# Altium PCB TLE5012_S2G1.PcbDoc
Units mm, origin at the board's own origin, x right, y up, seen from the top; angles counter-clockwise.
Board outline 14 x 38.5 mm, 2 copper layers (L1_Top, L14_Bot), stack 1.62 mm thick; 16 components, 14 nets, 84 pads, 47 vias.
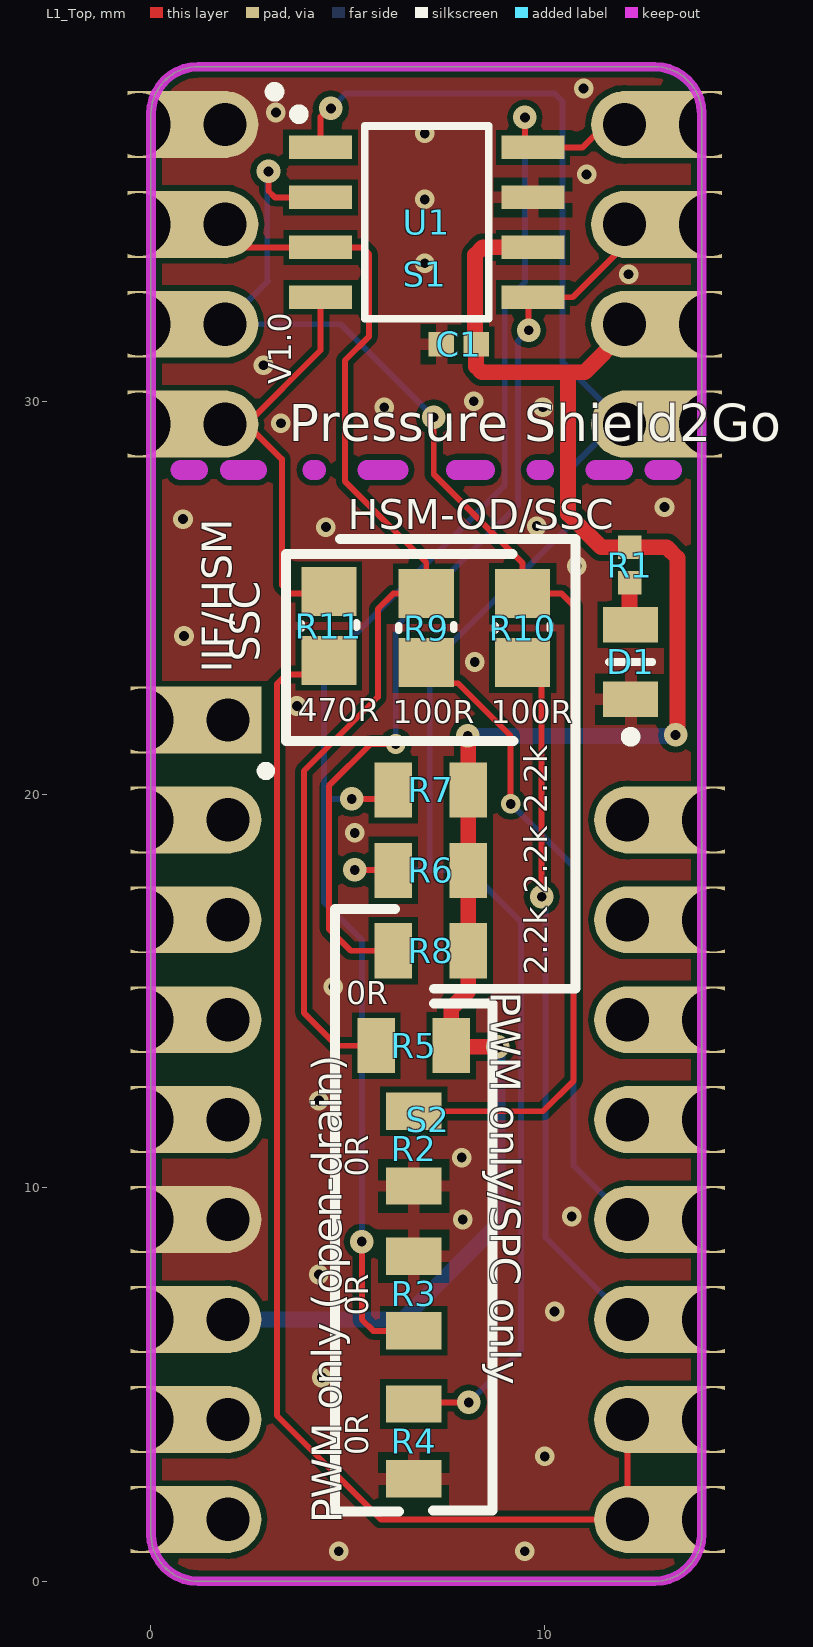
[diagram p0: L1_Top view]
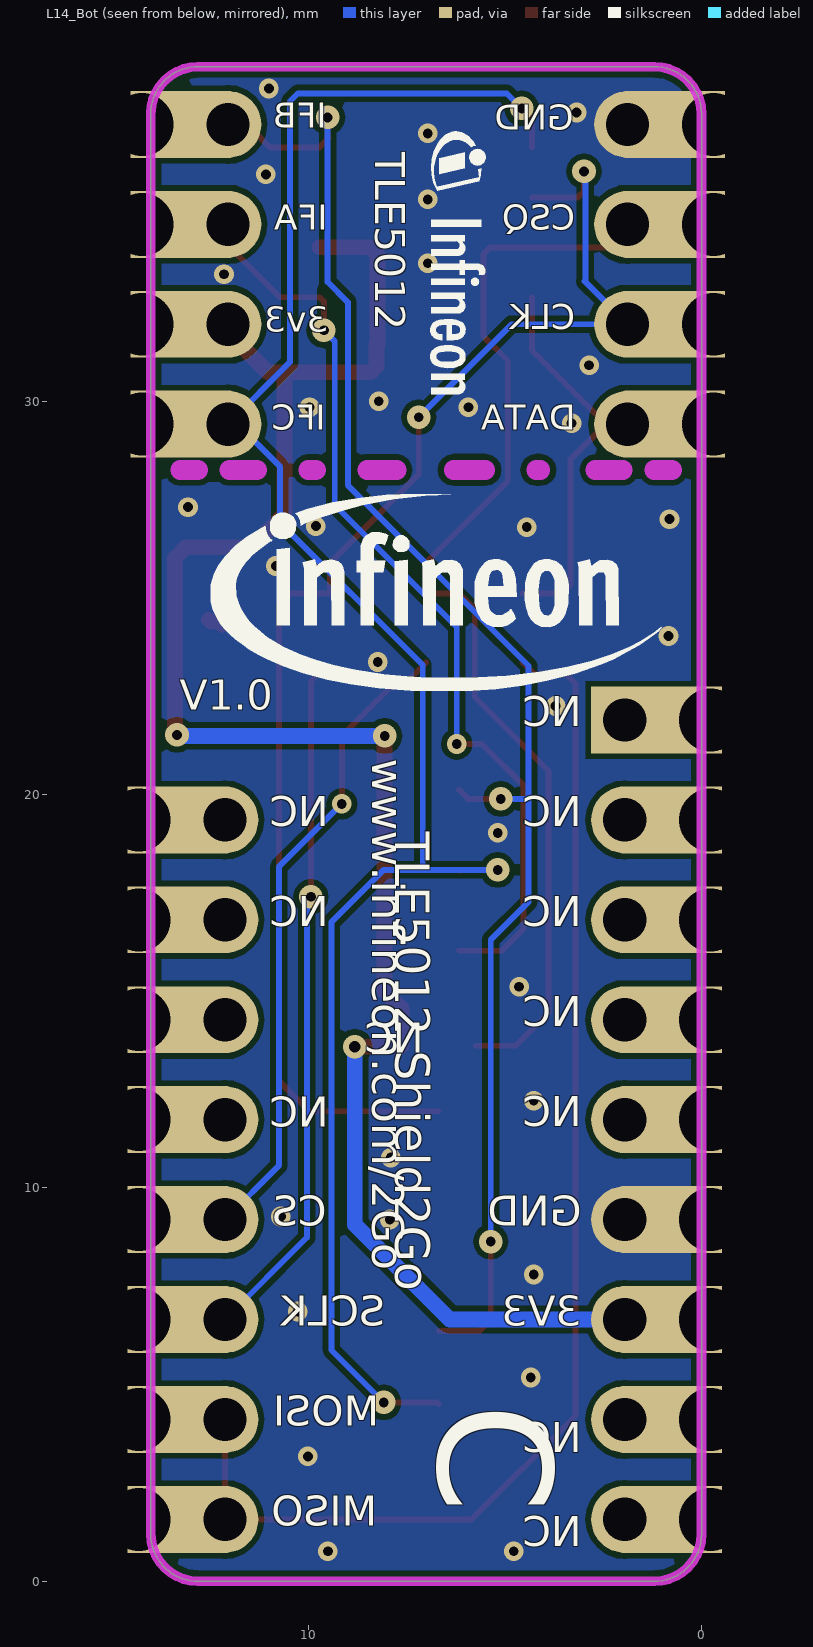
[diagram p1: L14_Bot view, seen from below]

## Layer stack, top to bottom
Top Solder: solder mask 0.02, Solder Resist, Dk 3.5
L1_Top: signal copper 0.035
Dielectric1: core 1.55, FR-4, Dk 4.2
L14_Bot: signal copper 0.035
Bottom Solder: solder mask 0.02, Solder Resist, Dk 3.5

## Board outline
0,1.2 0,37.3 cw(c1.2,37.3) 1.2,38.5 12.8,38.5 cw(c12.8,37.3) 14,37.3 14,1.2 cw(c12.8,1.2) 12.8,0 1.2,0 cw(c1.2,1.2)

## Design rules (kind name [scope] priority, off if disabled: settings)
Clearance ConnectorAndSidePads [(InNamedUnion('Connectors') OR InNamedUnion('Connector_Side_Pads')) vs OnLayer('Keep-Out Layer')] p1: gap=0 ignorepadtopadclearanceinfootprint=FALSE
Clearance Clearance_HighVoltage [InNetClass('HighVoltage') vs Not InNetClass('HighVoltage')] p2: gap=0.5 ignorepadtopadclearanceinfootprint=FALSE except(0: Arc-Hole Track-Hole SMDPad-Hole THPad-Hole Via-Hole Fill-Hole Poly-Hole Region-Hole Text-Hole)
Clearance Clearance_BGA [WithinRoom('BGA_Fanout_Area')] p3: gap=0.1 ignorepadtopadclearanceinfootprint=FALSE except(0: Arc-Hole Track-Hole SMDPad-Hole THPad-Hole Via-Hole Fill-Hole Poly-Hole Region-Hole Text-Hole) // Clearance for BGA Fanout Area
Clearance Clearance_NDK [((HoleType ='Round') and (PadisPlated = 'False')) and not (Holesize ='0')  or ((HoleType ='Slot') and (PadisPlated = 'False')) and not (Holesize ='0')] p4: gap=0.5 ignorepadtopadclearanceinfootprint=FALSE except(0: Arc-Hole Track-Hole SMDPad-Hole THPad-Hole Via-Hole Fill-Hole Poly-Hole Region-Hole Text-Hole) // Clearance Non Plated Holes
Clearance Clearance_Fiducials [InComponentClass('Fiducials')] p5: gap=1 ignorepadtopadclearanceinfootprint=FALSE except(0: Arc-Hole Track-Hole SMDPad-Hole THPad-Hole Via-Hole Fill-Hole Poly-Hole Region-Hole Text-Hole)
Clearance Clearance_Edge_Fiducials [InComponentClass('Fiducials')] p6 off: gap=6 ignorepadtopadclearanceinfootprint=FALSE except(0: Arc-Hole Track-Hole SMDPad-Hole THPad-Hole Via-Hole Fill-Hole Poly-Hole Region-Hole Text-Hole) // Protel DXP Scope 2 Expression Was: IsBoardOutline
Clearance Clearance_All [All] p7: gap=0.15 ignorepadtopadclearanceinfootprint=FALSE except(0: Arc-Hole Track-Hole SMDPad-Hole THPad-Hole Via-Hole Fill-Hole Poly-Hole Region-Hole Text-Hole) // minimum Clearance on PCB
ComponentClearance SidePadsClearance [InNamedUnion('Connector_Side_Pads')] p1: gap=0 collisioncheckmode=3 verticalgap=0 showdistances=FALSE
ComponentClearance R11-14/R21-24 [InNamedUnion('0OhmResistorsR11-14/R21-24') vs InNamedUnion('0OhmResistorsR11-14/R21-24')] p2: gap=0 collisioncheckmode=3 verticalgap=0 showdistances=FALSE
ComponentClearance ConnectorClearance [InNamedUnion('Connectors') vs InNamedUnion('Frame')] p3: gap=0 collisioncheckmode=3 verticalgap=0 showdistances=FALSE
ComponentClearance ComponentClearance_1 [All] p4: gap=0.254 collisioncheckmode=3 verticalgap=0.254 showdistances=FALSE
DiffPairsRouting DiffPairsRouting_Z0_DIFF_100R [InNetClass('Z0_DIFF_100R')] p1: maxlimit=0.2 minlimit=0.2 mostfreqgap=0.2 toplayer_minwidth=0.381 toplayer_maxwidth=0.381 toplayer_prefwidth=0.381 bottomlayer_minwidth=0.381 bottomlayer_maxwidth=0.381 bottomlayer_prefwidth=0.381 maxuncoupledlength=25
DiffPairsRouting DiffPairsRouting_All [All] p2: maxlimit=0.5 minlimit=0.12 mostfreqgap=0.15 toplayer_minwidth=0.381 toplayer_maxwidth=0.381 toplayer_prefwidth=0.381 bottomlayer_minwidth=0.381 bottomlayer_maxwidth=0.381 bottomlayer_prefwidth=0.381 maxuncoupledlength=25
FabricationTestPointUsage TestPointUsage [All] p1: valid=0 allowmultiple=FALSE
FabricationTestpoint Testpoint [All] p1: side=3 testpointundercomponent=TRUE minsize=1 maxsize=2.5 preferedsize=1.5 minholesize=0 maxholesize=1 preferedholesize=0.8 testpointgrid=0.025 allowsidetop=TRUE allowsidebottom=TRUE usegrid=TRUE gridtolerance=0
FanoutControl Fanout_LCC [All] p1 off: bgadir=Out bgaviamode=Centered fanoutstyle=Auto fanoutdirection=Alternating viagrid=0.025 // Protel DXP Scope 1 Expression Was: IsLCC   Fanout_LCC (Default Rule)
FanoutControl Fanout_BGA [All] p2 off: bgadir=Out bgaviamode=Centered fanoutstyle=Auto fanoutdirection=Alternating viagrid=0.025 // Protel DXP Scope 1 Expression Was: IsBGA   Fanout_BGA (Default Rule)
FanoutControl Fanout_SOIC [All] p3 off: bgadir=Out bgaviamode=Centered fanoutstyle=Auto fanoutdirection=Alternating viagrid=0.025 // Protel DXP Scope 1 Expression Was: IsSOIC   Fanout_SOIC (Default Rule)
FanoutControl Fanout_Default [All] p4: bgadir=Out bgaviamode=Centered fanoutstyle=Auto fanoutdirection=Alternating viagrid=0.025 // Fanout_Default (Default Rule)
FanoutControl Fanout_Small [All] p5 off: bgadir=Out bgaviamode=Centered fanoutstyle=Auto fanoutdirection=Alternating viagrid=0.025 // Protel DXP Scope 1 Expression Was: (CompPinCount < 5)   Fanout_Small (Default Rule)
Height Height_Top_In_Area [WithinRoom('Height_Top_Area')] p1: minheight=0 maxheight=8.4 prefheight=5.7 // Dedicated Height Constraint in Area
Height Height_Bot_No_Constraint [InComponentClass('Height_Bottom_exclude')] p2: minheight=0 maxheight=999 prefheight=12.7 // no max. Height constraint on Bottom Side
Height Height_Top_No_Constraint [InComponentClass('Height_Top_exclude')] p3: minheight=0 maxheight=999 prefheight=12.7 // no max. Height constraint on Top Side
Height Height_Bot [OnBottom] p4: minheight=0 maxheight=3 prefheight=2.5 // max. Component Height on PCB Bottom Side
Height Height_All [All] p5: minheight=0 maxheight=50 prefheight=12.7 // Default Component Height
HoleSize HoleSize_All [All] p1: absolutevalues=TRUE maxlimit=3 minlimit=0.2 maxpercent=80.000 minpercent=20.000
HoleToHoleClearance [All] p1: gap=0.25 allowstackedmicrovias=TRUE
Length Length_HighSpeed [InNetClass('HighSpeed')] p1: maxlimit=250 minlimit=0
Length Length_Default [InNetClass('TraceLength')] p2: maxlimit=500 minlimit=0 // min./max. Trace Length will be applied
MatchedLengths MatchedLengths_HighSpeed [InNetClass('HighSpeed')] p1: tolerance=25.4 checknetsindiffpair=FALSE checkdiffpairvsdiffpair=TRUE checkxsignals=TRUE checkothers=TRUE
MatchedLengths MatchedLengths_Default [InNetClass('MatchedLength')] p2: tolerance=100.5 checknetsindiffpair=TRUE checkdiffpairvsdiffpair=FALSE checkxsignals=FALSE checkothers=FALSE // Default Length Matching
MaxMinImpedance MaxMinImpedance_Z0_50R [InNetClass('Z0_50R')] p1: minimum=45,00 maximum=55,00 // Impedance Tolerance for 50 Ohms Traces
MaxMinImpedance MaxMinImpedance_All [All] p2: minimum=30,00 maximum=80,00 // Default Impedance Tolerance
MaximumViaCount MaximumViaCount_CLK [InNetClass('Clock')] p1: limit=10
MaximumViaCount MaximumViaCount_HighSpeed [InNetClass('HighSpeed')] p2: limit=10 // Max. Number of Vias in Net
MinimumAnnularRing MinimumAnnularRing_All [All] p1: minimumring=0.1
MinimumSolderMaskSliver [All] p1: minsoldermaskwidth=0.2
NetAntennae NetAntennae_High_Speed [InNetClass('HighSpeed')] p1: netantennaetolerance=3
NetAntennae NetAntennae_All [All] p2: netantennaetolerance=10
ParallelSegment ParallelSegment_Broad_Default [InNetClass('XTalk_Broadside_Coupled') vs InNetClass('HighSpeed') Or InNetClass('XTalk_Broadside_Coupled') Or InNetClass('XTalk_Edge_Coupled')] p1: limit=15 gap=0.2 // Default Rule for Broadside-Coupled Traces
ParallelSegment ParallelSegment_Edge_Default [InNetClass('XTalk_Edge_Coupled') vs InNetClass('HighSpeed') Or InNetClass('XTalk_Broadside_Coupled') Or InNetClass('XTalk_Edge_Coupled')] p2: limit=15 gap=0.12 // Default Rule for Edge-Coupled Traces
ParallelSegment ParallelSegment_Default [InNetClass('HighSpeed') vs InNetClass('HighSpeed')] p3: limit=25 gap=0.12 // Max. Coupled Length for all High-Speed Signals
PlaneClearance PlaneClearance_HighVoltage [InNetClass('HighVoltage')] p1: clearance=0.5
PlaneClearance [All] p2: clearance=0.2
PlaneConnect PlaneConnect_All [InNet('GND')] p1: planeconnectstyle=Direct reliefexpansion=0.2 reliefentries=4 reliefconductorwidth=0.25 reliefairgap=0.2
PolygonConnect PolygonConnect_Via [IsNamedPolygon('GND-B') Or IsNamedPolygon('GND-T') vs IsVia] p1: thpad.connectstyle=Direct thpad.reliefconductorwidth=0.254 thpad.reliefentries=4 thpad.polygonreliefangle="90 Angle" thpad.airgapwidth=0.254 smdpad.connectstyle=Relief smdpad.reliefconductorwidth=0.3 smdpad.reliefentries=4 smdpad.polygonreliefangle="90 Angle" smdpad.airgapwidth=0.2 via.connectstyle=Direct via.reliefconductorwidth=0.254 via.reliefentries=4 via.polygonreliefangle="90 Angle" via.airgapwidth=0.254
PolygonConnect PolygonConnectGroundVias [InNamedUnion('GroundVias')] p2: connectstyle=Direct reliefconductorwidth=0.254 reliefentries=4 polygonreliefangle="90 Angle" airgapwidth=0.254
PolygonConnect PolygonConnect_All [All] p3: thpad.connectstyle=Direct thpad.reliefconductorwidth=0.3 thpad.reliefentries=4 thpad.polygonreliefangle="90 Angle" thpad.airgapwidth=0.2 smdpad.connectstyle=Relief smdpad.reliefconductorwidth=0.3 smdpad.reliefentries=4 smdpad.polygonreliefangle="90 Angle" smdpad.airgapwidth=0.2 via.connectstyle=Direct via.reliefconductorwidth=0.3 via.reliefentries=4 via.polygonreliefangle="90 Angle" via.airgapwidth=0.2 // Default Polygon Connection
PolygonConnect PolygonConnect_HighCurrent [(OnTopLayer Or OnBottomLayer) And InNetClass('HighCurrent')] p4: connectstyle=Relief reliefconductorwidth=0.25 reliefentries=4 polygonreliefangle="90 Angle" airgapwidth=0.25
PolygonConnect PolygonConnect_Outer [OnTopLayer Or OnBottomLayer] p5: connectstyle=Relief reliefconductorwidth=0.2 reliefentries=4 polygonreliefangle="90 Angle" airgapwidth=0.25 // Polygon Connection on outer Layers
RoutingCorners [All] p1: cornerstyle=45-Degree minsetback=2 maxsetback=2
RoutingTopology RoutingTopology_CLK [InNetClass('Clock')] p1: topology=Daisy_Balanced
RoutingTopology RoutingTopology_HighSpeed [InNetClass('HighSpeed')] p2: topology=Daisy_Simple
RoutingTopology RoutingTopology_All [All] p3: topology=Shortest
RoutingVias RoutingVias_All [All] p1: holewidth=0.35 width=0.5 viastyle="Through Hole" minholewidth=0.15 minwidth=0.3 maxholewidth=0.4 maxwidth=0.6 // Default Via size
RoutingVias RoutingVias_HighCurrent [InNetClass('HighCurrent')] p2 off: holewidth=0.3 width=0.9 viastyle="Through Hole" minholewidth=0.3 minwidth=0.9 maxholewidth=0.4 maxwidth=0.9 // Via Size for High-Current Nets
RoutingVias RoutingVias_BGA_Fanout [WithinRoom('BGA_Fanout_Area')] p3 off: holewidth=0.2 width=0.48 viastyle="Through Hole" minholewidth=0.2 minwidth=0.48 maxholewidth=0.3 maxwidth=0.8 // Via Size for BGA Fanout Area
RoutingVias RoutingVias_PWR [(InNet('GND') OR InNet('PWR_3V3'))] p4 off: holewidth=0.3 width=0.8 viastyle="Through Hole" minholewidth=0.25 minwidth=0.8 maxholewidth=0.3 maxwidth=0.9 // Via size for Power and GND nets
SilkToSilkClearance [All] p1: silktosilkclearance=0.15
SilkToSolderMaskClearance SilkscreenOverComponentPads [IsPad] p1: minsilkscreentomaskgap=0.2 clearancetoexposedcopper=TRUE
SolderMaskExpansion SolderMaskExpansion_1 [All] p1: expansion=0
StubLength StubLength_CLK [InNetClass('Clock')] p1: limit=25
StubLength StubLength_HighSpeed [InNetClass('HighSpeed')] p2: limit=30
SupplyNets SupplyNets_GND [InNet('GND')] p1: voltage=0,000
SupplyNets SupplyNets_12V [InNetClass('PWR_Supply_12V')] p2: voltage=12,00
SupplyNets SupplyNets_5V0 [InNetClass('PWR_Supply_5V0')] p3: voltage=5,000
SupplyNets SupplyNets_3V3 [InNetClass('PWR_Supply_3V3')] p4: voltage=3,000
SupplyNets SupplyNets_1V0 [InNetClass('PWR_Supply_1V0')] p5: voltage=1,000
Width Width_PWR [(InNet('GND') OR InNet('PWR_3V3'))] p1: maxlimit=5 minlimit=0.2 preferedwidth=0.4 // Width for Power and GND nets
Width Width_All [All] p2: maxlimit=2 minlimit=0.15 preferedwidth=0.15 // minimum Width on PCB
Width Width_HighCurrent [All] p3: maxlimit=5 minlimit=0.3 preferedwidth=0.3 // Width for High-Current Traces
Width Width_BGA_Fanout [WithinRoom('BGA_Fanout_Area')] p4: maxlimit=1 minlimit=0.1 preferedwidth=0.1 // Trace Width for BGA Fanout Area
Width Width_Z0_DIFF_100R [InNetClass('Z0_DIFF_100R')] p5: maxlimit=0.12 minlimit=0.12 preferedwidth=0.12 minimp=50.000000 maximp=50.000000 favimp=50.000000
Width Width_Z0_50R [InNetClass('Z0_50R')] p6: maxlimit=0.16 minlimit=0.16 preferedwidth=0.16 minimp=50.000000 maximp=50.000000 favimp=50.000000
10 further rules are at their usual default settings.

## Classes and differential pairs
component class U_TLE5012_S2G1: C1 D1 R1 R2 R3 R4 R5 R6 R7 R8 R9 R10 R11 S1 U1
component class U_Modular_S2G1_Pinout_Diagram_Connectors_V1: S2

## Components (designator, comment, footprint, x,y, rotation, side; value= is the part's Value field where it differs from the comment)
C1 "0.10u" CAPC1005X55N-0 7.823,31.445 r0 top
D1 "" LEDC2013X90N 12.192,23.368 r90 top value=SML-211UT
R1 "680R" RESC1005X03N 12.167,25.832 r90 top
R2 "0R" RESC2013X60N 6.68,10.998 r270 top
R3 "0R" RESC2013X60N 6.68,7.315 r90 top
R4 "0R" RESC2013X60N 6.68,3.556 r270 top
R5 "0R" RESC2013X60N 6.68,13.614 r0 top
R6 "2.2k" RESC2013X60N 7.112,18.072 r0 top value=0R
R7 "2.2k" RESC2013X60N 7.112,20.117 r0 top value=0R
R8 "2.2k" RESC2013X60N 7.112,16.027 r0 top value=0R
R9 "100R" RESC2012X05N 6.998,24.232 r90 top
R10 "100R" RESC2012X05N 9.449,24.232 r90 top
R11 "470R" RESC2012X05N 4.521,24.282 r90 top
S1 "Shield2Go-S2G-2A" PIN_8_2R_4_A 1.88,29.413 r0 top locked
S2 "" Modular_S2G1_A 1.956,1.575 r0 top locked
U1 "TLE5012B" SOIC127P600X175-8N-3 7.01,34.544 r0 top

## Footprints (in the part's own frame and the unit in brackets; to place one, negate y for a bottom-side part, rotate by r counter-clockwise, add the part's x,y. Pads: shape width x height; smd on the part's side, far side on the other; paste and mask are expansions set on the pad)
CAPC1005X55N-0 [mm] "Capacitor,non-polarized,Chip;1.00mm L X 0.50mm W X 0.55mm H"
  rect 0.65x0.62 smd paste+0 mask+0: 1(-0.44,0) 2(0.44,0)
  body extent -0.5,-0.25 0.5,0.25, height 0.55
LEDC2013X90N [mm] "LED,Chip;2.00mm L X 1.25mm W X 0.90mm H"
  rect 0.9x1.4 smd paste+0 mask+0: 1(-0.95,0) 2(0.95,0)
  silkscreen extent -2.02,-0.55 0,0.55, body extent -1,-0.63 1,0.63, height 0.9
Modular_S2G1_A [mm] "Modular M1 active footprint for modular boards."
  rect 2.565x1.7 hole 1.6 copper offset 0.982,0 paste+0 mask+0: 1(-2.18,20.32) 2(-2.18,17.78) 3(-2.18,15.24) 4(-2.18,12.7) 5(-2.18,10.16) 6(-2.18,7.62) 7(-2.18,5.08) 8(-2.18,2.54) 9(-2.18,0)
  rect 1.7x1.7 hole 1.1 paste+0 mask+0: 1(0,20.32)
  round 1.7 hole 1.1 paste+0 mask+0: 2(0,17.78) 3(0,15.24) 4(0,12.7) 5(0,10.16) 6(0,7.62) 7(0,5.08) 8(0,2.54) 9(0,0) 10(10.16,17.78) 11(10.16,15.24) 12(10.16,12.7) 13(10.16,10.16) 14(10.16,7.62) 15(10.16,5.08) 16(10.16,2.54) 17(10.16,0)
  rect 2.565x1.7 hole 1.6 copper offset -0.982,0 paste+0 mask+0: 10(12.34,17.78) 11(12.34,15.24) 12(12.34,12.7) 13(12.34,10.16) 14(12.34,7.62) 15(12.34,5.08) 16(12.34,2.54) 17(12.34,0)
  silkscreen extent 0.86,18.92 1.07,19.13
PIN_8_2R_4_A [mm] "Connector for 8 pins, 2 rows of each 4 with 400mil/100mil spacing."
  rect 2.565x1.7 hole 1.6 copper offset 0.982,0 paste+0 mask+0: 1(-2.18,7.62) 2(-2.18,5.08) 3(-2.18,2.54) 4(-2.18,0)
  round 1.7 hole 1.1 paste+0 mask+0: 1(0,7.62) 2(0,5.08) 3(0,2.54) 4(0,0) 5(10.16,7.62) 6(10.16,5.08) 7(10.16,2.54) 8(10.16,0)
  rect 2.565x1.7 hole 1.6 copper offset -0.982,0 paste+0 mask+0: 5(12.34,7.62) 6(12.34,5.08) 7(12.34,2.54) 8(12.34,0)
  silkscreen extent 1.14,8.32 1.39,8.57
RESC1005X03N [mm] "Resistor,Chip;1.00mm L X 0.50mm W X 0.40mm H"
  rect 0.6x0.6 smd paste+0 mask+0: 1(-0.45,0) 2(0.45,0)
  body extent -0.5,-0.25 0.5,0.25, height 0.4
RESC2012X05N [mm] "Chip Resistor, 2-Leads, Body 2,0x1,3mm, IPC Medium Density"
  rect 1.25x1.4 smd mask+0: 1(-0.875,0) 2(0.875,0)
  silkscreen extent -0.05,-0.7 0.08,0.7, body extent -1.07,-0.7 1.08,0.7, height 0.5
RESC2013X60N [mm] "Resistor,Chip;2.00mm L X 1.25mm W X 0.60mm H"
  rect 0.95x1.4 smd paste+0 mask+0: 1(-0.95,0) 2(0.95,0)
  body extent -1,-0.63 1,0.63, height 0.6
SOIC127P600X175-8N-3 [mm] "SOIC,1.27mm pitch;8 pin,3.90mm W X 4.90mm L X 1.75mm H body"
  rect 1.6x0.6 smd paste+0 mask+0: 1(-2.7,1.905) 2(-2.7,0.635) 3(-2.7,-0.635) 4(-2.7,-1.905) 5(2.7,-1.905) 6(2.7,-0.635) 7(2.7,0.635) 8(2.7,1.905)
  silkscreen extent -3.37,-2.45 1.58,2.87, body extent -3,-2.46 3,2.47, height 1.74

## Part data
C1: library part CAP01001501, "GRM-Series General Purpose Monolithic Ceramic Capacitor", Manufacturer=muRata, Manufacturer Component Status=Active, ManufacturerPartNumber=GRM155R60J104JA01#, TemperaturCharacteristic=X5R, Tolerance=5%, Voltage=6.3Vdc, AutomotiveQualified=no, ComponentLink1Description="Vendor WebSite", ComponentLink1URL=http://www.murata.com, ComponentLink2Description=Datasheet, ComponentLink2URL=http://psearch.murata.com/capacitor/product/GRM155R60J104JA01%23.pdf, ComponentStatus=Released, FixedSupplier=No, PackageDescription="Capacitor,non-polarized,Chip;1.00mm L X 0.50mm W X 0.55mm H", PackageReference=CAPC1005X55N-0, PartNumber=CAP01001501, PartProvision=No, PartRelease=new, PartType="Ceramic Capacitor", Type=0.10u/6.3Vdc
D1: library part DIO01300220, "Mini-mold Chip LED, Red", Manufacturer="Rohm Semiconductors", Manufacturer Component Status=Discontinued, ManufacturerPartNumber=SML-211UTT86K, Supplier Part Number 1=1685056, Voltage=1.8V, AutomotiveQualified=no, ComponentHeight=0.9mm, ComponentLink1Description="Vendor WebSite", ComponentLink1URL=http://www.rohm.com/, ComponentLink2Description=Datasheet, ComponentLink2URL=\\MUCSDN31.eu.infineon.com\PCB_Library_Datasheets\sml-21.pdf, ComponentStatus=Released, FixedSupplier=yes, ForCONCATENATE_Description="Mini-mold Chip LED, Red", PackageDescription="LED,Chip;2.00mm L X 1.25mm W X 0.90mm H", PackageReference=2012(0805), PartNumber=DIO01300220, PartProvision=no, PartRelease=new, Supplier 1=Farnell, Supplier 2=Digi-Key, Supplier 3=Mouser, Supplier Part Number 2=511-1292-2-ND, Supplier Part Number 3=755-SML-211UTT86, Symbol Type="Standard LED Symbol, 1 Cathode, 2 Anode"
R1: library part RES00000023, "680R/50V/1%", Manufacturer=Yageo/Phycomp, Manufacturer Component Status=Active, ManufacturerPartNumber=RC0402FR-07680R, Power=0.063W, Tolerance=1%, Voltage=50V, Alternate View=yes, AutomotiveQualified=no, ComponentHeight=0.35mm, ComponentLink1Description="Vendor WebSite", ComponentLink1URL=http://www.yageo.com/portal/index.jsp, ComponentLink2Description=Datasheet, ComponentLink2URL=\\MUCSDN31.eu.infineon.com\PCB_Library_Datasheets\E070020_TD.pdf, ComponentStatus=Undefined, FixedSupplier=No, PackageReference=0402, PartNumber=RES00000023, PartProvision=No, PartRelease=new, PartType="Thick Film Chip Resistor", TK=100, Type=680R/50V/1%
R2 R3 R4 R5: library part 336013, "Automotive Grade Thick Film Chip Resistor", Legacy PartNumber=RES00001814, Manufacturer=Yageo, Manufacturer Component Status=Active, Temperature max=155, Temperature min=-55, Temperature Range=Military, Alternate View=Yes, Article Number=336013, Automotive Qualified="AEC Q200", Combined Parameters=TCR:0ppm/K;Tol.:-0R/+0R;Vdc:150V;Idc:2A;P:125mW, ComponentLink1Description="Vendor WebSite", ComponentLink1URL=http://www.yageo.com/, ComponentLink2Description=Datasheet, ComponentLink2URL=http://webnetprod.muc.infineon.com/pcbportal_prod/WorkFlows/AltiumComponent/StandardDocumentation?Versionid=336014, ComponentStatus=Released, Legacy DeviceID=RES00001814, Manufacturer Order Number=AC0805JR-070RL, Multiple Parts=No, PackageReference=0805, Part Type=Resistor, RoHS Compliant=Y, Second Source allowed=Yes, Style=Single, Supplier 1=Farnell, Supplier 2=DigiKey, Supplier 3=Mouser, Supplier Part Number 3=603-AC0805JR-070RL, Symbol Type="Resistor; Single; Standard; 2 Pins", Technology="Thick Film", Tolerance Neg=0R, Tolerance Pos=0R, Type=Standard, Version Number=V01
R6: library part 336013, "Automotive Grade Thick Film Chip Resistor", Legacy PartNumber=RES00001814, Manufacturer=Yageo, Manufacturer Component Status=Active, Temperature max=155, Temperature min=-55, Temperature Range=Military, Tolerance Neg=0R, Alternate View=Yes, Article Number=336013, Automotive Qualified="AEC Q200", Combined Parameters=TCR:0ppm/K;Tol.:-0R/+0R;Vdc:150V;Idc:2A;P:125mW, ComponentLink1Description="Vendor WebSite", ComponentLink1URL=http://www.yageo.com/, ComponentLink2Description=Datasheet, ComponentLink2URL=http://webnetprod.muc.infineon.com/pcbportal_prod/WorkFlows/AltiumComponent/StandardDocumentation?Versionid=336014, ComponentStatus=Released, Legacy DeviceID=RES00001814, Manufacturer Order Number=AC0805JR-070RL, Multiple Parts=No, PackageReference=0805, Part Type=Resistor, RoHS Compliant=Y, Second Source allowed=Yes, Style=Single, Supplier 1=Farnell, Supplier 2=DigiKey, Supplier 3=Mouser, Supplier Part Number 3=603-AC0805JR-070RL, Symbol Type="Resistor; Single; Standard; 2 Pins", Technology="Thick Film", Tolerance Pos=0R, Type=Standard, Version Number=V01
R7 R8: library part 328131, "General Purpose Chip Resistor", Legacy PartNumber=RES00000150, Manufacturer=Yageo, Manufacturer Component Status=Active, Supplier Part Number 1=9233750RL, Temperature max=155, Temperature min=-55, Temperature Range=Military, Tolerance Neg=0R, Alternate View=Yes, Article Number=328131, Automotive Qualified=No, Combined Parameters=TCR:0ppm/K;Tol.:-0R/+0R;Vdc:150V;Idc:2A;P:125mW, ComponentLink1Description="Vendor WebSite", ComponentLink1URL=http://www.yageo.com/, ComponentLink2Description=Datasheet, ComponentLink2URL=http://webnetprod.muc.infineon.com/pcbportal_prod/WorkFlows/AltiumComponent/StandardDocumentation?Versionid=328132, ComponentStatus=Released, Legacy DeviceID=RES00000150, Manufacturer Order Number=RC0805JR-070RL, Multiple Parts=No, PackageReference=0805, Part Type=Resistor, RoHS Compliant=Y, Second Source allowed=Yes, Style=Single, Supplier 1=Farnell, Supplier 2=DigiKey, Supplier 3=Mouser, Supplier Part Number 2=311-0.0ARTR-ND, Supplier Part Number 3=603-RC0805JR-070RL, Symbol Type="Resistor; Single; Standard; 2 Pins", Technology="Thick Film", Tolerance Pos=0R, Type=Standard, Version Number=V01
R9 R10: library part 328831, "General Purpose Chip Resistor", Legacy PartNumber=RES00000289, Manufacturer=Yageo, Manufacturer Component Status=Active, Temperature max=155, Temperature min=-55, Temperature Range=Military, Tolerance Neg=1%, Alternate View=Yes, Article Number=328831, Automotive Qualified=No, Combined Parameters=TCR:200ppm/K;Tol.:-1%/+1%;Vdc:150V;Idc:-;P:250mW, ComponentLink1Description="Vendor WebSite", ComponentLink1URL=http://www.yageo.com/, ComponentLink2Description=Datasheet, ComponentLink2URL=http://webnetprod.muc.infineon.com/pcbportal_prod/WorkFlows/AltiumComponent/StandardDocumentation?Versionid=328832, ComponentStatus="Not Validated", Legacy DeviceID=RES00000289, Manufacturer Order Number=RC0805FRL-7W100RL, Multiple Parts=No, PackageReference=0805, Part Type=Resistor, RoHS Compliant=Y, Second Source allowed=Yes, Style=Single, Supplier 1=Farnell, Supplier 2=DigiKey, Supplier 3=Mouser, Symbol Type="Resistor; Single; Standard; 2 Pins", Technology="Thick Film", Tolerance Pos=1%, Type=Standard, Version Number=V01
R11: library part 328341, "General Purpose Chip Resistor", Legacy PartNumber=RES00000191, Manufacturer=Yageo, Manufacturer Component Status=Active, Temperature max=155, Temperature min=-55, Temperature Range=Military, Tolerance Neg=1%, Alternate View=Yes, Article Number=328341, Automotive Qualified=No, Combined Parameters=TCR:100ppm/K;Tol.:-1%/+1%;Vdc:150V;Idc:-;P:125mW, ComponentLink1Description="Vendor WebSite", ComponentLink1URL=http://www.yageo.com/, ComponentLink2Description=Datasheet, ComponentLink2URL=http://webnetprod.muc.infineon.com/pcbportal_prod/WorkFlows/AltiumComponent/StandardDocumentation?Versionid=328342, ComponentStatus="Not Validated", Legacy DeviceID=RES00000191, Manufacturer Order Number=RC0805FR-07470RL, Multiple Parts=No, PackageReference=0805, Part Type=Resistor, RoHS Compliant=Y, Second Source allowed=Yes, Style=Single, Supplier 1=Farnell, Supplier 2=DigiKey, Supplier 3=Mouser, Symbol Type="Resistor; Single; Standard; 2 Pins", Technology="Thick Film", Tolerance Pos=1%, Type=Standard, Version Number=V01
S1: "8 Pin Connector for Head of Shield2Go Boards", Manufacturer="Infineon Technologies", Manufacturer Component Status=Active, AutomotiveQualified=no, ComponentHeight=0mm, ComponentLink1Description="Vendor WebSite", ComponentLink1URL=http://www.infineon.com, ComponentLink2Description=Datasheet, ComponentName=S2G-2A, ComponentStatus=Released
S2: library part ModularIFX_S2G_1A, "17 Pin Active Connector S2G1 Modular Boards.", Manufacturer="Infineon Technologies", Manufacturer Component Status=Active, AutomotiveQualified=no, ComponentHeight=0mm, ComponentLink1Description="Vendor WebSite", ComponentLink1URL=http://www.infineon.com, ComponentLink2Description=Datasheet, ComponentName=S2G_1A, ComponentStatus=Released
U1: library part 420976, "GMR-Based Angle Sensor, SPI, IIF Interface", Legacy PartNumber=IFX01400182, Manufacturer=Infineon, Manufacturer Component Status=Active, Temperature Range=Military, Article Number=420976, Automotive Qualified="AEC Q100-002", ComponentLink1Description="Vendor WebSite", ComponentLink1URL=http://www.infineon.com, ComponentLink2Description=Datasheet, ComponentLink2URL=http://webnetprod.muc.infineon.com/pcbportal_prod/WorkFlows/AltiumComponent/StandardDocumentation?Versionid=420977, ComponentStatus=Released, Legacy DeviceID="IFX_TLE5012B E1000", Manufacturer Order Number="TLE5012B E1000", PackageReference=PG-DSO-8, Part Type=Sensor, Second Source allowed=Yes, Supplier 1=Farnell, Supplier 2=DigiKey, Supplier 3=Mouser, Supplier Part Number 3=726-TLE5012BE1000, Symbol Type="GMR-Based Angle Sensor", Version Number=V01

## Via types
v1: diameter 0.5, hole 0.25, L1_Top to L14_Bot, 34 vias
v2: diameter 0.6, hole 0.25, L1_Top to L14_Bot, 12 vias
v3: diameter 0.6, hole 0.3, L1_Top to L14_Bot, 1 vias

## Nets (pads, with @x,y where several pads share a name; then routed paths per layer and width w, separated by ;. In a path a pad name is that pad's centre, name@x,y a point inside that pad or via, vN(x,y) a via of type N, cw(c..) or ccw(c..) an arc to the next point about the centre after c; other vN are vias at no path point)
CS_N: R9.1 S2.14 | length 16.4
  L1_Top w0.15: R9.1 7.527,22.827 7.805,22.827 9.144,21.488 v1(9.144,19.761)
  L14_Bot w0.15: v1(9.144,19.761) 10.744,18.161 10.744,10.566 S2.14@12.116,9.195
CSQ: R5.1 R9.2 S1.2 U1.3 | length 29.9
  L1_Top w0.15: S1.2@0.35,34.493 0.934,33.909 U1.3 5.368,33.909 5.545,33.731 5.545,31.648 4.928,31.031 4.928,27.965 6.998,25.895 R9.2 6.158,25.107 5.766,24.714 5.766,22.479 3.886,20.599 3.886,14.453 4.724,13.614 R5.1
DATA: R11.2 S1.4 U1.4 | length 12.5
  L1_Top w0.15: S1.4@-0.3,29.413 2.431,29.413 4.31,31.293 U1.4 ; S1.4@2.438,29.413 3.327,28.524 3.327,25.324 3.545,25.107 R11.2@4.547,25.107
GND: C1.1 D1.1 R2.2 R3.2 R4.2 S1.1 S2.6 U1.7
  other v1: 4.775,0.762 9.5,0.762 10.008,3.175 4.343,5.182 10.262,6.858 4.267,7.798 7.925,9.195 10.694,9.271 7.899,10.77 4.267,12.217 4.637,15.113 5.182,19.025 3.708,22.25 8.23,23.368 0.838,24.028 10.82,25.806 4.445,26.797 9.804,26.822 0.813,27 13.056,27.305 3.302,29.439 5.928,29.845 9.964,29.845 8.204,29.997 2.858,30.912 12.141,33.223 6.96,33.503 6.96,35.128 11.074,35.763 6.96,36.805 3.175,37.338 10.998,37.948
IFA: R8.1 S1.6 U1.5 | length 23.9
  L1_Top w0.15: R8.1 5.08,16.027 4.521,16.586 4.521,20.218 5.585,21.282 v1(6.223,21.282) ; v2(9.601,31.801) 9.601,32.53 U1.5 10.719,32.639 12.04,33.96 S1.6@12.04,34.493
  L14_Bot w0.15: v1(6.223,21.282) 6.223,24.257 9.325,27.359 9.325,31.525 v2(9.601,31.801)
IFB: R3.1 R7.1 S1.5 U1.8 | length 39.8
  L1_Top w0.15: v2(5.105,19.888) 5.933,19.888 R7.1 ; v2(5.359,8.636) 5.359,6.655 5.649,6.365 R3.1 ; v2(9.505,37.211) 9.505,36.691 9.487,36.673 U1.8 10.973,36.449 11.557,37.033 S1.5@12.04,37.033
  L14_Bot w0.15: v2(5.105,19.888) 4.394,19.888 ; v2(5.359,8.636) 5.359,16.307 4.394,17.272 4.394,19.888 ; v2(9.505,37.211) 9.505,33.026 8.992,32.512 8.992,27.864 4.394,23.266 4.394,19.888
IFC: R4.1 R6.1 S1.8 U1.1 | length 49.6
  L1_Top w0.15: U1.1 4.31,37.229 4.547,37.465 v2(4.572,37.44) ; v2(5.182,18.085) 6.149,18.085 R6.1 ; R4.1 6.721,4.547 v2(8.077,4.547)
  L14_Bot w0.15: v2(4.572,37.44) 4.953,37.821 10.262,37.821 10.465,37.617 10.465,30.988 12.04,29.413 11.791,29.413 10.719,28.341 10.719,26.924 7.087,23.292 7.087,18.085 ; v2(5.182,18.085) 7.087,18.085 ; v2(8.077,4.547) 9.411,5.88 9.411,16.751 8.077,18.085 7.087,18.085
INT/GPIO3: S2.8
MISO: R11.1 S2.16 S2.17 | length 32.7
  L1_Top w0.15: R11.1@4.547,23.357 4.24,23.05 3.442,23.05 3.2,22.809 3.2,4.216 5.842,1.575 12.116,1.575 S2.16@12.116,4.115
NetD1_2: D1.2 R1.1 | length 1.1
  L1_Top w0.4: R1.1 12.167,24.343 D1.2 ; D1.2@12.471,24.394 D1.2@12.522,24.445
PWR_3V3: C1.2 R1.2 R5.2 R6.2 R7.2 R8.2 S1.7 S2.7 U1.6 | length 49.2
  L1_Top w0.4: v2(8.052,21.488) 8.062,21.478 R7.2 R6.2 8.062,14.996 7.63,14.564 R5.2 7.656,13.589 v3(8.814,13.589) ; C1.2@8.238,31.445 8.238,33.714 8.433,33.909 U1.6 ; C1.2 8.263,30.878 8.407,30.734 10.541,30.734 ; S1.7@12.04,31.953 12.04,31.75 11.024,30.734 10.541,30.734 ; v2@13.386,21.615 13.386,26.01 13.114,26.282 R1.2 11.445,26.282 10.6,27.127 10.6,30.675 10.541,30.734
  L14_Bot w0.4: S2.7@-0.224,6.655 1.956,6.655 6.401,6.655 8.814,9.068 v3(8.814,13.589) ; v2(8.052,21.488) 13.31,21.488 v2(13.335,21.514)
SCK: R10.1 S2.15 | length 17.3
  L1_Top w0.15: R10.1@9.811,22.994 9.931,22.874 v2(9.931,17.399)
  L14_Bot w0.15: v2(9.931,17.399) 10.033,17.297 10.033,8.738 S2.15@12.116,6.655
SCK_TLE: R2.1 R10.2 S1.3 U1.2 | length 38
  L1_Top w0.15: v2(2.987,35.839) 2.987,35.341 3.15,35.179 U1.2 ; R2.1 9.967,11.948 10.744,12.725 10.744,24.802 10.439,25.107 R10.2 9.449,25.879 7.188,28.14 v2(7.188,29.591)
  L14_Bot w0.15: S1.3@-0.3,31.953 S1.3@1.88,31.953 ; v2(2.987,35.839) 2.955,35.807 2.955,33.063 2.972,33.045 S1.3@1.88,31.953 ; v2(7.188,29.591) 4.826,31.953 S1.3@1.88,31.953
XMC2GO_P0_5: S2.9
pads on no net: S2.1 S2.2 S2.3 S2.4 S2.5 S2.10 S2.11 S2.12 S2.13

## Polygon pours and split planes (outlines as drawn)
GND on L1_Top "GND_TOP" (solid, remove dead copper, pour order 15): 0,1.2 0,37.3 cw(c1.2,37.3) 1.2,38.5 12.8,38.5 cw(c12.8,37.3) 14,37.3 14,1.2 cw(c12.8,1.2) 12.8,0 1.2,0 cw(c1.2,1.2)
GND on L14_Bot "GND_TOP" (solid, pour order 17): -0.076,38.506 0,38.43 0,-0.025 14.199,-0.025 14.046,0.127 14.046,38.532

## Keep-outs
Keep-Out Layer:
  lines w0.25: 14,37.3 14,1.2 cw(c12.8,1.2) 12.8,0 1.2,0 cw(c1.2,1.2) 0,1.2 0,37.3 cw(c1.2,37.3) 1.2,38.5 12.8,38.5 cw(c12.8,37.3) 14,37.305
  lines w0.5: 0.75,28.25 1.2,28.25 ; 2,28.25 2.7,28.25 ; 4.1,28.25 4.2,28.25 ; 5.5,28.25 6.3,28.25 ; 7.75,28.25 8.5,28.25 ; 9.8,28.25 10,28.25 ; 11.3,28.25 12,28.25 ; 12.8,28.25 13.25,28.25

## Other copper
L1_Top:
  pour cut-out: 10.66,36.899 10.704,36.855 11.054,36.855 10.878,36.678 10.802,36.754 10.668,36.754
  pour cut-out: 8.255,14.464 8.255,14.529 8.687,14.961 8.687,15.177 8.419,15.177 8.152,14.911 8.152,14.582
  pour cut-out: 8.687,19.267 8.687,18.922 8.419,18.922 8.419,19.267
  pour cut-out: 8.687,17.222 8.687,16.877 8.419,16.877 8.419,17.222
  pour cut-out: 7.437,15.177 7.437,14.91 7.471,14.91 7.612,15.05 7.559,15.103 7.559,15.177
  pour cut-out: 7.437,17.222 7.437,16.877 7.705,16.877 7.705,17.222
  pour cut-out: 7.437,19.267 7.437,18.922 7.705,18.922 7.705,19.267
  pour cut-out: 10.299,24.743 10.299,24.332 10.515,24.332 10.527,24.343 10.515,24.356 10.515,24.707 10.426,24.796
  pour cut-out: 6.553,24.382
  pour cut-out: 5.995,24.531 5.996,24.531 5.996,24.333 6.146,24.333 6.148,24.332 6.148,24.481 6.089,24.481 6.148,24.481 6.148,24.332 5.994,24.332
  text "Layer" at 50.074,-24.254 h0.7
  text "Gerber" at 64.752,-24.254 h0.7
  text "Name" at 50.074,-25.654 h0.7
  text "Document" at 64.752,-25.654 h0.7
  text "L1_Top" at 50.124,-36.324 h1
  text "(.GTL)" at 64.802,-36.324 h1
L14_Bot:
  pour cut-out: 9.712,33.012 9.777,32.841 9.777,32.225 9.4,32.225 9.348,32.173 9.28,32.241 9.221,32.241 9.221,32.428 9.28,32.487
  pour cut-out: 6.011,24.345 5.997,24.359 5.811,24.359 8.876,27.423 8.917,27.382 9.013,27.382
  pour cut-out: 11.399,28.448 11.399,27.94 13.005,27.94 13.005,28.448
  text "Layer" at 50.074,-24.254 h0.7
  text "Gerber" at 64.752,-24.254 h0.7
  text "Name" at 50.074,-25.654 h0.7
  text "Document" at 64.752,-25.654 h0.7
  text "L2_Bot" at 50.124,-40.248 h1
  text "(.GBL)" at 64.802,-40.248 h1

## Silkscreen, mask and mechanical layers (free items; w line width, h text height)
Top Overlay:
  lines w0.254: 4.801,26.492 10.795,26.492 10.795,23.51 10.795,19.847 ; 6.198,17.094 4.674,17.094 4.674,1.778 6.299,1.778 ; 7.163,1.803 8.687,1.803 8.687,14.681 7.188,14.681 ; 7.188,15.062 10.795,15.062 10.795,19.847 ; 9.195,26.111 3.429,26.111 3.429,21.361 9.22,21.361
  text "V1.0" at 3.759,30.429 h1 r90
  text "Pressure Shield2Go" at 3.505,28.677 h1.6
  text "HSM-OD/SSC" at 5.004,26.492 h1.3
  text "SSC" at 3.023,23.368 h1.3 r90
  text "IIF/HSM" at 2.311,23.089 h1.3 r90
  text "PWM only/SPC only" at 8.382,14.986 h1.3 r270
  text "PWM only (open-drain)" at 5.105,1.473 h1.3 r90
  text "Layer" at 50.074,-24.254 h0.7
  text "Gerber" at 64.752,-24.254 h0.7
  text "Name" at 50.074,-25.654 h0.7
  text "Document" at 64.752,-25.654 h0.7
  text "Top Overlay" at 50.124,-28.324 h1
  text "(.GTO)" at 64.802,-28.324 h1
Bottom Overlay:
  drawing of 27 lines, arcs and shapes, not listed
  text "TLE5012" at 8.553,36.322 h1.3 r90
  text "V1.0" at 13.259,21.895 h1.3
  text "www.infineon.com/2Go" at 8.636,20.904 h1.4 r90
  text "TLE5012 Shield2Go" at 8.077,19.05 h1.5 r90
  text "C" at 7.645,4.521 h5 r90
Top Solder:
  text "Layer" at 50.074,-24.254 h0.7
  text "Gerber" at 64.752,-24.254 h0.7
  text "Name" at 50.074,-25.654 h0.7
  text "Document" at 64.752,-25.654 h0.7
  text "Top Solder" at 50.124,-32.324 h1
  text "(.GTS)" at 64.802,-32.324 h1
Bottom Solder:
  text "Layer" at 50.074,-24.254 h0.7
  text "Gerber" at 64.752,-24.254 h0.7
  text "Name" at 50.074,-25.654 h0.7
  text "Document" at 64.752,-25.654 h0.7
  text "Bottom Solder" at 50.124,-44.324 h1
  text "(.GBS)" at 64.801,-44.324 h1
Drill Guide:
  lines w0.25: 14,37.3 14,1.2 cw(c12.8,1.2) 12.8,0 1.2,0 cw(c1.2,1.2) 0,1.2 0,37.3 cw(c1.2,37.3) 1.2,38.5 12.8,38.5 cw(c12.8,37.3) 14,37.305
  lines w0.254: 19.939,27.94 19.558,28.448 ; 19.939,28.956 19.558,28.448 ; 25.4,28.448 19.558,28.448
  lines w0.5: 0.75,28.25 1.2,28.25 ; 2.004,28.25 2.704,28.25 ; 4.1,28.25 4.2,28.25 ; 5.5,28.25 6.3,28.25 ; 7.112,26.67 7.812,26.67 ; 7.75,28.25 8.5,28.25 ; 9.8,28.25 10,28.25 ; 11.3,28.25 12,28.25 ; 12.802,28.25 13.25,28.25
  text "Information on Drilling" at -61.341,48.26 h6
  text "Lines indicate board outline as well as board cutouts (find same lines in Keep-Out layer)." at -61.341,41.275 h3
  text "Drill Ø 0.50mm. / Final dimension of inner board cut-out are lines (as in Keep-Out layer). / Take care of copper/routes between cut-outs." at 26.924,22.987 h3
  text "All holes on long sides plated;  / outer holes (greater ones) designed as 'Castellated Holes', compare drill drawing legend." at 31.75,11.024 h3
M5 (Sheet_Top):
  drawing of 56 lines, arcs and shapes, not listed
  text "1" at -44.388,143.422 h2
  text "2" at 5.612,143.422 h2
  text "3" at 55.612,143.422 h2
  text "4" at 105.612,143.422 h2
  text "5" at 155.612,143.422 h2
  text "6" at 205.612,143.422 h2
  text "7" at 255.612,143.422 h2
  text "8" at 305.612,143.422 h2
  text "A" at -67.388,111.922 h2
  text "A" at 327.612,111.922 h2
  text "B" at -67.388,41.922 h2
  text "B" at 327.612,41.922 h2
  text "C" at -67.388,-28.078 h2
  text "C" at 327.612,-28.078 h2
  text "ENGINEER:" at 212.582,-97.078 h1.2
  text "TITLE:" at 250.682,-97.078 h1.2
  text "D" at -67.388,-98.078 h2
  text "D" at 327.612,-98.078 h2
  text "PCB DESIGNER:" at 212.582,-104.578 h1.2
  text ".PRJ_Title" at 252.612,-106.078 h3
  text ".PRJ_PCBDesigner" at 213.612,-109.078 h2
  text "DATE:" at 212.582,-112.078 h1.2
  text "PART NO.:" at 250.682,-112.078 h1.2
  text "REL:" at 300.612,-112.078 h1.2
  text "REV:" at 313.612,-112.078 h1.2
  text ".PRJ_Organization" at 169.776,-115.078 h2
  text ".PRINT_DATE" at 213.612,-116.078 h2
  text ".PRJ_PCB_Release" at 301.612,-116.078 h2
  text ".PRJ_PCB_Revision" at 314.612,-116.078 h2
  text ".PRJ_Address1" at 180.612,-118.078 h2
  text "SVN REVISION:" at 212.582,-119.578 h1.2
  text "FILE NAME:" at 250.682,-119.578 h1.2
  text "APRV:" at 300.612,-119.578 h1.2
  text "SCALE:" at 313.612,-119.578 h1.2
  text "Am Campeon 1-12" at 175.218,-121.078 h2
  text ".VersionControl_RevNumber" at 213.612,-123.078 h2
  text ".PCB_FILE_NAME_NO_PATH" at 251.612,-123.078 h2
  text ".PRJ_PCBApprovedBy" at 301.612,-123.078 h2
  text "1:1" at 316.612,-123.078 h2
  text "85579 NEUBIBERG - GERMANY" at 167.162,-124.078 h2
  text "C" at 211.912,-126.928 h0.9
  text ".PRJ_Copyright" at 213.612,-127.078 h1.2
  text "1" at -44.388,-131.578 h2
  text "2" at 5.612,-131.578 h2
  text "3" at 55.612,-131.578 h2
  text "4" at 105.612,-131.578 h2
  text "5" at 155.612,-131.578 h2
  text "6" at 205.612,-131.578 h2
  text "7" at 255.612,-131.578 h2
  text "8" at 305.612,-131.578 h2
M6 (Sheet_Bot):
  drawing of 56 lines, arcs and shapes, not listed
  text "8" at -44.388,143.422 h2
  text "7" at 5.612,143.422 h2
  text "6" at 55.612,143.422 h2
  text "5" at 105.612,143.422 h2
  text "4" at 155.612,143.422 h2
  text "3" at 205.612,143.422 h2
  text "2" at 255.612,143.422 h2
  text "1" at 305.612,143.422 h2
  text "A" at -66.388,111.922 h2
  text "A" at 328.612,111.922 h2
  text "B" at -66.388,41.922 h2
  text "B" at 328.612,41.922 h2
  text "C" at -66.388,-28.078 h2
  text "C" at 328.612,-28.078 h2
  text "TITLE:" at 10.542,-97.078 h1.2
  text "ENGINEER:" at 48.642,-97.078 h1.2
  text "D" at -66.388,-98.078 h2
  text "D" at 328.612,-98.078 h2
  text "PCB DESIGNER:" at 48.642,-104.578 h1.2
  text ".PRJ_Title" at 8.612,-106.078 h3
  text ".PRJ_PCBDesigner" at 47.612,-109.078 h2
  text "REV:" at -52.388,-112.078 h1.2
  text "REL:" at -39.388,-112.078 h1.2
  text "PART NO.:" at 10.542,-112.078 h1.2
  text "DATE:" at 48.642,-112.078 h1.2
  text ".PRJ_Organization" at 91.448,-115.078 h2
  text ".PRJ_PCB_Revision" at -53.388,-116.078 h2
  text ".PRJ_PCB_Release" at -40.388,-116.078 h2
  text ".PRINT_DATE" at 47.612,-116.078 h2
  text ".PRJ_Address1" at 80.612,-118.078 h2
  text "SCALE:" at -52.388,-119.578 h1.2
  text "APRV:" at -39.388,-119.578 h1.2
  text "FILE NAME:" at 10.542,-119.578 h1.2
  text "SVN REVISION:" at 48.642,-119.578 h1.2
  text "Am Campeon 1-12" at 86.006,-121.078 h2
  text "1:1" at -55.388,-123.078 h2
  text ".PRJ_PCBApprovedBy" at -40.388,-123.078 h2
  text ".PCB_FILE_NAME_NO_PATH" at 9.612,-123.078 h2
  text ".VersionControl_RevNumber" at 47.612,-123.078 h2
  text "85579 NEUBIBERG - GERMANY" at 94.062,-124.078 h2
  text "C" at 49.312,-126.928 h0.9
  text ".PRJ_Copyright" at 47.612,-127.078 h1.2
  text "8" at -44.388,-131.578 h2
  text "7" at 5.612,-131.578 h2
  text "6" at 55.612,-131.578 h2
  text "5" at 105.612,-131.578 h2
  text "4" at 155.612,-131.578 h2
  text "3" at 205.612,-131.578 h2
  text "2" at 255.612,-131.578 h2
  text "1" at 305.612,-131.578 h2
Drill Drawing:
  circle w0.254: c-59.055,65.363 r0.847
  lines w0.254: -59.902,70.019 -58.208,70.019 -59.055,68.326 -59.902,70.019 ; -59.902,72.136 -58.208,72.136 -58.208,73.829 -59.902,73.829 -59.902,72.136 ; -59.902,75.946 -59.055,76.369 -58.208,75.946 -58.632,76.793 -58.208,77.639 -59.055,77.216 -59.902,77.639 -59.478,76.793 -59.902,75.946
  lines w0.381: -61.42,63.373 107.749,63.373 ; -61.42,78.613 107.749,78.613 ; -47.428,59.563 -47.428,82.423 ; -33.716,59.563 -33.716,82.423 ; -5.53,59.563 -5.53,82.423 ; 7.319,59.563 7.319,82.423 ; 25.958,59.563 25.958,82.423 ; 56.175,59.563 56.175,82.423 ; 71.157,59.563 71.157,82.423 ; 90.101,59.563 90.101,82.423 ; -61.42,59.563 107.749,59.563 107.749,82.423 -61.42,82.423 -61.42,59.563
  text "Drill Legend" at -61.468,81.534 h6
  text "Symbol" at -59.134,79.756 h1.83
  text "Count" at -46.285,79.756 h1.83
  text "Hole Size" at -32.573,79.756 h1.83
  text "Plated" at -4.387,79.756 h1.83
  text "Hole Type" at 8.462,79.756 h1.83
  text "Drill Layer Pair" at 27.101,79.756 h1.83
  text "Via/Pad" at 57.318,79.756 h1.83
  text "Pad Shape" at 72.3,79.756 h1.83
  text "Template" at 91.244,79.756 h1.83
  text "1" at -46.285,75.946 h1.52
  text "0,300mm (11,81mil)" at -32.573,75.946 h1.52
  text "PTH" at -4.387,75.946 h1.52
  text "Round" at 8.462,75.946 h1.52
  text "L1_Top - L14_Bot" at 27.101,75.946 h1.52
  text "Via" at 57.318,75.946 h1.52
  text "Rounded" at 72.3,75.946 h1.52
  text "v60h30" at 91.244,75.946 h1.52
  text "25" at -46.285,72.136 h1.52
  text "1,100mm (43,31mil)" at -32.573,72.136 h1.52
  text "PTH" at -4.387,72.136 h1.52
  text "Round" at 8.462,72.136 h1.52
  text "L1_Top - L14_Bot" at 27.101,72.136 h1.52
  text "Pad" at 57.318,72.136 h1.52
  text "(Mixed)" at 72.3,72.136 h1.52
  text "(Mixed)" at 91.244,72.136 h1.52
  text "25" at -46.285,68.326 h1.52
  text "1,600mm (62,99mil)" at -32.573,68.326 h1.52
  text "PTH" at -4.387,68.326 h1.52
  text "Round" at 8.462,68.326 h1.52
  text "L1_Top - L14_Bot" at 27.101,68.326 h1.52
  text "Pad" at 57.318,68.326 h1.52
  text "Rectangle" at 72.3,68.326 h1.52
  text "(Mixed)" at 91.244,68.326 h1.52
  text "46" at -46.285,64.516 h1.52
  text "0,250mm (9,84mil)" at -32.573,64.516 h1.52
  text "PTH" at -4.387,64.516 h1.52
  text "Round" at 8.462,64.516 h1.52
  text "L1_Top - L14_Bot" at 27.101,64.516 h1.52
  text "Via" at 57.318,64.516 h1.52
  text "Rounded" at 72.3,64.516 h1.52
  text "(Mixed)" at 91.244,64.516 h1.52
  text "97 Total" at -46.285,60.706 h1.52
Mechanical 32:
  lines w0.02: 3.7,-25.774 38.7,-25.774 ; 13.7,-43.774 38.2,-43.774 ; 14.2,-59.774 14.2,-55.774 ; 14.2,-57.774 38.7,-57.774 ; 14.2,-55.274 14.2,-51.274 ; 14.2,-53.274 38.7,-53.274 ; 14.2,-50.774 14.2,-46.774 ; 14.2,-48.774 38.7,-48.774 ; 14.2,-43.774 14.2,-37.774 ; 14.2,-41.774 38.7,-41.774 ; 14.2,-39.774 38.7,-39.774 ; 15.7,-30.274 15.7,-28.274 ; 15.7,-23.274 15.7,-21.274 ; 22.7,-55.274 22.7,-51.274 ; 22.7,-50.774 22.7,-46.774 ; 22.7,-37.274 22.7,-33.274 ; 22.7,-30.274 22.7,-28.274 ; 22.7,-25.774 22.7,-23.774 ; 26.7,-37.274 26.7,-33.274 ; 27.7,-23.274 27.7,-21.274 ; 30.7,-59.774 30.7,-55.774 ; 30.7,-55.274 30.7,-51.274 ; 30.7,-50.774 30.7,-46.774 ; 30.7,-46.274 30.7,-44.274 ; 30.7,-37.274 30.7,-33.274 ; 30.7,-30.274 30.7,-28.274 ; 30.7,-27.774 30.7,-23.774 ; 34.7,-59.774 34.7,-55.774 ; 34.7,-55.274 34.7,-51.274 ; 34.7,-50.774 34.7,-46.774 ; 34.7,-46.274 34.7,-44.274 ; 34.7,-37.274 34.7,-33.274 ; 34.7,-32.774 34.7,-30.774 ; 34.7,-27.774 34.7,-25.774 ; 3.7,-59.774 3.7,-55.774 38.7,-55.774 38.7,-59.774 3.7,-59.774 ; 3.7,-55.274 38.7,-55.274 38.7,-51.274 3.7,-51.274 3.7,-55.274 ; 3.7,-50.774 3.7,-46.774 38.7,-46.774 38.7,-50.774 3.7,-50.774 ; 3.7,-46.274 38.7,-46.274 38.7,-44.274 3.7,-44.274 3.7,-46.274 ; 3.7,-43.774 3.7,-37.774 38.7,-37.774 38.7,-43.774 3.7,-43.774 ; 3.7,-37.274 38.7,-37.274 38.7,-33.274 3.7,-33.274 3.7,-37.274 ; 3.7,-32.774 3.7,-30.774 38.7,-30.774 38.7,-32.774 3.7,-32.774 ; 3.7,-30.274 38.7,-30.274 38.7,-28.274 3.7,-28.274 3.7,-30.274 ; 3.7,-27.774 38.7,-27.774 38.7,-23.774 3.7,-23.774 3.7,-27.774 ; 3.7,-23.274 3.7,-21.274 38.7,-21.274 38.7,-23.274 3.7,-23.274
  lines w0.15: 48.699,-48.774 ccw(c49.699,-48.774) 49.699,-49.774 153.699,-49.774 ccw(c153.699,-48.774) 154.699,-48.774 ; 48.7,-48.774 48.7,-18.824 cw(c49.7,-18.824) 49.7,-17.824 153.7,-17.824 cw(c153.7,-18.824) 154.7,-18.824 154.7,-48.774 ; 50.049,-26.149 153.4,-26.149 ; 50.049,-23.129 153.4,-23.129
  lines w0.2: 2.7,-59.274 2.7,-18.774 ; 2.7,-59.174 ccw(c3.8,-59.174) 3.8,-60.274 ; 2.7,-18.874 cw(c3.8,-18.874) 3.8,-17.774 ; 3.7,-60.274 38.7,-60.274 ; 3.7,-17.774 38.7,-17.774 ; 4.2,-22.274 14.7,-22.274 ; 14.7,-42.774 38.2,-42.774 ; 14.7,-38.774 38.2,-38.774 ; 16.2,-29.274 22.2,-29.274 ; 23.2,-35.274 26.2,-35.274 ; 27.2,-35.274 30.2,-35.274 ; 28.2,-22.274 38.4,-22.274 ; 31.2,-29.274 38.2,-29.274 ; 31.2,-24.774 38.2,-24.774 ; 35.188,-58.774 38.188,-58.774 ; 35.188,-56.774 38.188,-56.774 ; 35.195,-54.251 38.195,-54.251 ; 35.2,-52.274 38.2,-52.274 ; 35.2,-49.774 38.2,-49.774 ; 35.2,-47.774 38.2,-47.774 ; 35.2,-45.274 38.2,-45.274 ; 35.2,-35.274 38.2,-35.274 ; 35.2,-26.774 38.2,-26.774 ; 38.6,-60.274 ccw(c38.6,-59.174) 39.7,-59.174 ; 38.6,-17.774 cw(c38.6,-18.874) 39.7,-18.874 ; 39.7,-59.274 39.7,-18.774 ; 161.408,-19.874 174.908,-19.874 ; 204.058,-20.174 217.558,-20.174
  text "TECHNOLOGY" at 161.508,-19.374 h1.3
  text "CREATED BY" at 204.058,-19.674 h1.3
  text "MATERIAL SPECIFICATION" at 7.2,-20.274 h1.3
  text "Layer Stack Up Detail for: .PRJ_Title .VariantName" at 50.224,-21.682 h1.6
  text "TRACK WIDTH:" at 161.508,-22.124 h1.1
  text "0.150mm" at 176.008,-22.124 h1.1
  text "Infineon Technologies AG" at 204.058,-22.424 h1.1
  text "SINGLESIDED" at 4.2,-22.774 h1
  text "DOUBLESIDED" at 16.45,-22.774 h1
  text "MULTILAYER" at 28.7,-22.774 h1
  text "Layer" at 50.074,-24.254 h0.7
  text "Gerber" at 64.752,-24.254 h0.7
  text "Copper" at 75.05,-24.254 h0.7
  text "Dielectric" at 86.507,-24.254 h0.7
  text "Dielectric" at 98.408,-24.254 h0.7
  text "Dielectric" at 109.8,-24.254 h0.7
  text "Dielectric" at 121.65,-24.254 h0.7
  text "CLEARENCE:" at 161.508,-24.374 h1.1
  text "0.150mm" at 176.008,-24.374 h1.1
  text "Am Campeon 1-12" at 204.058,-24.674 h1.1
  text "MATERIAL" at 4.2,-25.274 h1.1
  text "FR4" at 15.2,-25.274 h1.1
  text "TG130" at 24.2,-25.274 h1.1
  text "TG280" at 32.2,-25.274 h1.1
  text "Name" at 50.074,-25.654 h0.7
  text "Document" at 64.752,-25.654 h0.7
  text "Thickness" at 75.05,-25.654 h0.7
  text "Height" at 86.507,-25.654 h0.7
  text "Material" at 98.408,-25.654 h0.7
  text "Constant" at 109.8,-25.654 h0.7
  text "Type" at 121.65,-25.654 h0.7
  text "ANNULAR RING:" at 161.508,-26.624 h1.1
  text "0.175mm" at 176.008,-26.624 h1.1
  text "85579 Neubiberg" at 204.058,-26.924 h1.1
  text "RoHS conform" at 4.2,-27.274 h1.1
  text "YES" at 31.2,-27.274 h1.1
  text "NO" at 35.7,-27.274 h1.1
  text "Top Overlay" at 50.124,-28.324 h1
  text "(.GTO)" at 64.802,-28.324 h1
  text "HOLE SIZE:" at 161.508,-28.874 h1.1
  text "0.350mm" at 176.008,-28.874 h1.1
  text "Germany" at 204.058,-29.174 h1.1
  text "IPC-A-600H" at 4.2,-29.774 h1.1
  text "CLASS1" at 16.45,-29.774 h1.1
  text "CLASS2" at 23.7,-29.774 h1.1
  text "CLASS3" at 31.7,-29.774 h1.1
  text "ALL DIMENSIONS AND HOLES ARE FINAL" at 161.508,-31.318 h1.1
  text "Contact Name" at 204.058,-31.618 h1.1
  text "Manuel Hollfelder" at 221.058,-31.618 h1.1
  text "PCB THICKNESS mm" at 4.2,-32.274 h1.1
  text "1.66" at 34.9,-32.274 h1.1
  text "Top Solder" at 50.124,-32.324 h1
  text "(.GTS)" at 64.802,-32.324 h1
  text "THE THICKNESS OF THE INSULATING" at 161.508,-33.596 h1.1
  text "Contact Phone" at 204.058,-33.896 h1.1
  text "+49 (89) 234-24630" at 221.058,-34.174 h1.1
  text "COPPER THICKNESS" at 4.2,-34.774 h1.1
  text "9" at 24.2,-35.774 h1.1
  text "18" at 27.7,-35.774 h1.1
  text "35" at 31.7,-35.774 h1.1
  text "70" at 35.7,-35.774 h1.1
  text "LAYERS IS OBLIGATORY" at 161.508,-35.874 h1.1
  text "Contact Email" at 204.058,-36.174 h1.1
  text "manuel.hollfelder@infineon.com" at 221.058,-36.174 h1.1
  text "L1_Top" at 50.124,-36.324 h1
  text "(.GTL)" at 64.802,-36.324 h1
  text "0.035mm" at 75.1,-36.324 h1
  text "AFTER PLATING um" at 4.2,-36.774 h1.1
  text "1.55" at 86.557,-38.324 h1
  text "FR-4" at 98.408,-38.324 h1
  text "4.7" at 109.85,-38.324 h1
  text "Core" at 121.7,-38.324 h1
  text "HAL leadfree" at 15.7,-39.274 h1.1
  text "L2_Bot" at 50.124,-40.248 h1
  text "(.GBL)" at 64.802,-40.248 h1
  text "0.035mm" at 75.1,-40.324 h1
  text "SURFACE" at 4.2,-41.274 h1.1
  text "Ni/Au" at 15.7,-41.274 h1.1
  text "chem. Sn" at 15.7,-43.274 h1.1
  text "Bottom Solder" at 50.124,-44.324 h1
  text "(.GBS)" at 64.801,-44.324 h1
  text "THROUGH PLATED BOARD" at 4.2,-45.774 h1.1
  text "YES" at 31.2,-45.774 h1.1
  text "NO" at 35.7,-45.774 h1.1
  text "SOLDER" at 4.2,-48.274 h1.1
  text "RED" at 15.7,-48.274 h1.1
  text "TOP" at 25.2,-48.274 h1.1
  text "YES" at 31.2,-48.274 h1.1
  text "NO" at 35.7,-48.274 h1.1
  text "Bottom Overlay" at 50.124,-48.324 h1
  text "(.GBO)" at 64.802,-48.324 h1
  text "MASK" at 4.2,-50.274 h1.1
  text "RED" at 15.7,-50.274 h1.1
  text "BOT" at 25.2,-50.274 h1.1
  text "YES" at 31.2,-50.274 h1.1
  text "NO" at 35.7,-50.274 h1.1
  text "SILK-" at 4.2,-52.774 h1.1
  text "WHITE" at 15.7,-52.774 h1.1
  text "TOP" at 25.2,-52.774 h1.1
  text "YES" at 31.2,-52.774 h1.1
  text "NO" at 35.7,-52.774 h1.1
  text "SCREEN" at 4.2,-54.774 h1.1
  text "WHITE" at 15.7,-54.774 h1.1
  text "BOT" at 25.2,-54.774 h1.1
  text "YES" at 31.2,-54.774 h1.1
  text "NO" at 35.7,-54.774 h1.1
  text "ELECTRICAL" at 18.2,-57.274 h1.1
  text "YES" at 31.2,-57.274 h1.1
  text "NO" at 35.7,-57.274 h1.1
  text "TEST" at 4.2,-58.274 h1.1
  text "AOI" at 21.7,-59.274 h1.1
  text "YES" at 31.2,-59.274 h1.1
  text "NO" at 35.7,-59.274 h1.1

## Dimensions
2.704,28.25 to 2.004,28.25 on Drill Guide
1.2,28.25 to 0.75,28.25 on Drill Guide
13.25,28.25 to 12.802,28.25 on Drill Guide
7.112,26.67 to 7.812,26.67 on Drill Guide
6.3,28.25 to 5.5,28.25 on Drill Guide
7.75,28.25 to 8.5,28.25 on Drill Guide
9.8,28.25 to 10,28.25 on Drill Guide
12,28.25 to 11.3,28.25 on Drill Guide
4.2,28.25 to 4.1,28.25 on Drill Guide
1.2,0 to 1.2,38.5 on Drill Guide
0,37.3 to 14,37.3 on Drill Guide

## Text inside footprints (layer, text, board x,y; h text height)
S1: Bottom Overlay "GND" at 3.251,36.678 h1.1; Bottom Overlay "CSQ" at 3.205,34.139 h1.1; Bottom Overlay "CLK" at 3.205,31.605 h1.1; Bottom Overlay "DATA" at 3.204,29.062 h1.1; Bottom Overlay "IFB" at 9.525,36.728 h1.1; Bottom Overlay "IFA" at 9.5,34.138 h1.1; Bottom Overlay "3v3" at 9.474,31.547 h1.1; Bottom Overlay "IFC" at 9.55,29.058 h1.1
S2: Bottom Overlay "NC" at 9.474,18.939 h1.3; Bottom Overlay "NC" at 9.474,11.305 h1.3; Bottom Overlay "CS" at 9.522,8.779 h1.3; Bottom Overlay "SCLK" at 8.037,6.239 h1.3; Bottom Overlay "MOSI" at 8.188,3.699 h1.3; Bottom Overlay "MISO" at 8.24,1.159 h1.3; Bottom Overlay "NC" at 3.051,0.631 h1.3; Bottom Overlay "NC" at 3.051,3.025 h1.3; Bottom Overlay "3V3" at 3.051,6.244 h1.3; Bottom Overlay "GND" at 3.051,8.779 h1.3; Bottom Overlay "NC" at 3.051,21.486 h1.3; Bottom Overlay "NC" at 3.051,13.859 h1.3; Bottom Overlay "NC" at 3.051,11.319 h1.3; Bottom Overlay "NC" at 3.05,18.937 h1.3; Bottom Overlay "NC" at 3.05,16.397 h1.3; Bottom Overlay "NC" at 9.474,16.399 h1.3; Bottom Overlay "NC" at 7.06,13.185 h1.3